# Altium PCB FLOLED.PcbDoc
Units mm, origin at the board's own origin, x right, y up, seen from the top; angles counter-clockwise.
Board outline 24.22 x 34.56 mm, 2 copper layers (Top Layer, Bottom Layer); 27 components, 13 nets, 64 pads, 10 vias.
Unrouted connection lines stored in the file: 3.
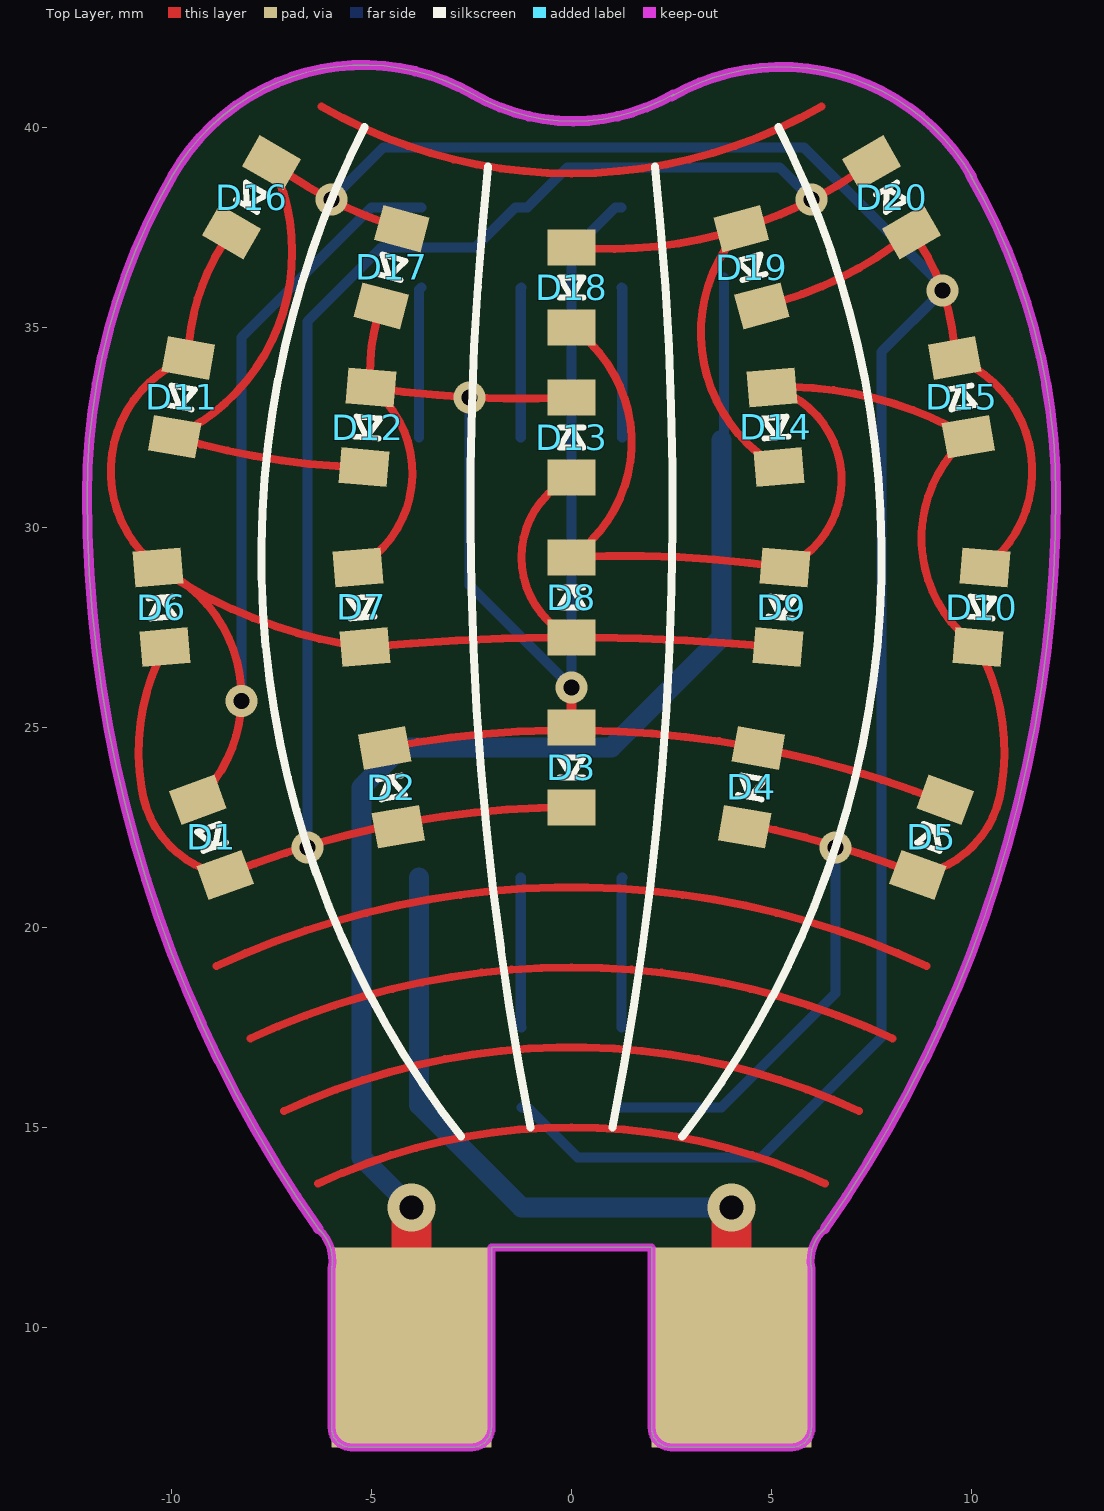
[diagram p0: Top Layer view]
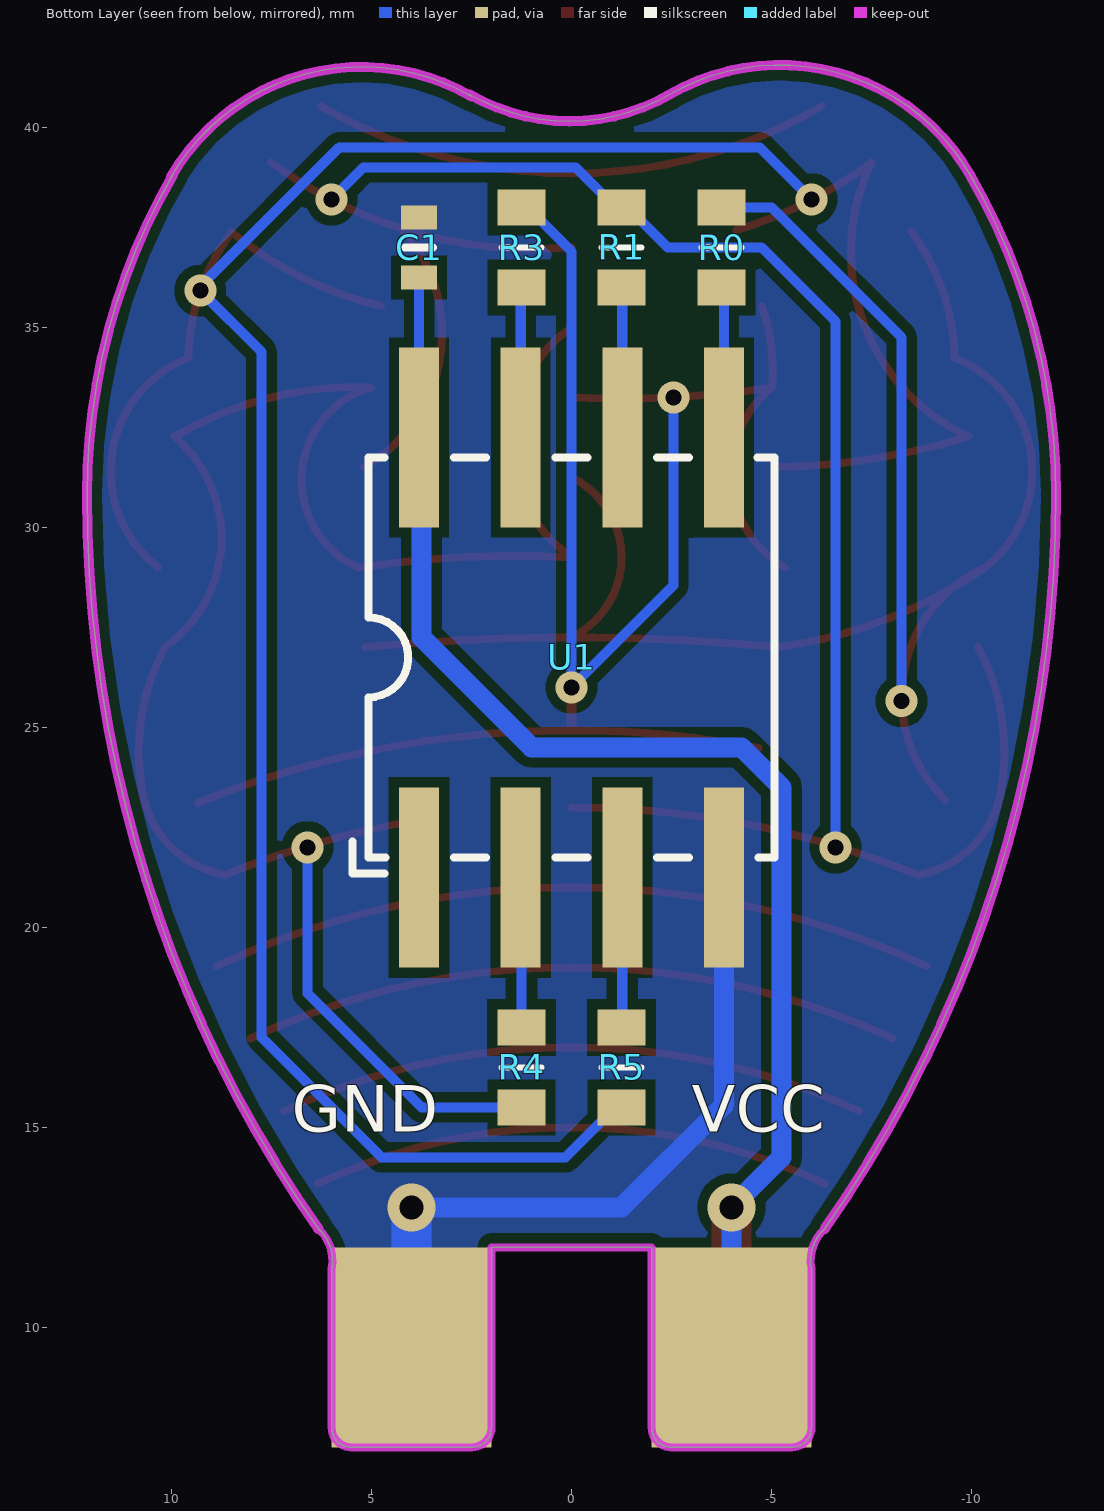
[diagram p1: Bottom Layer view, seen from below]
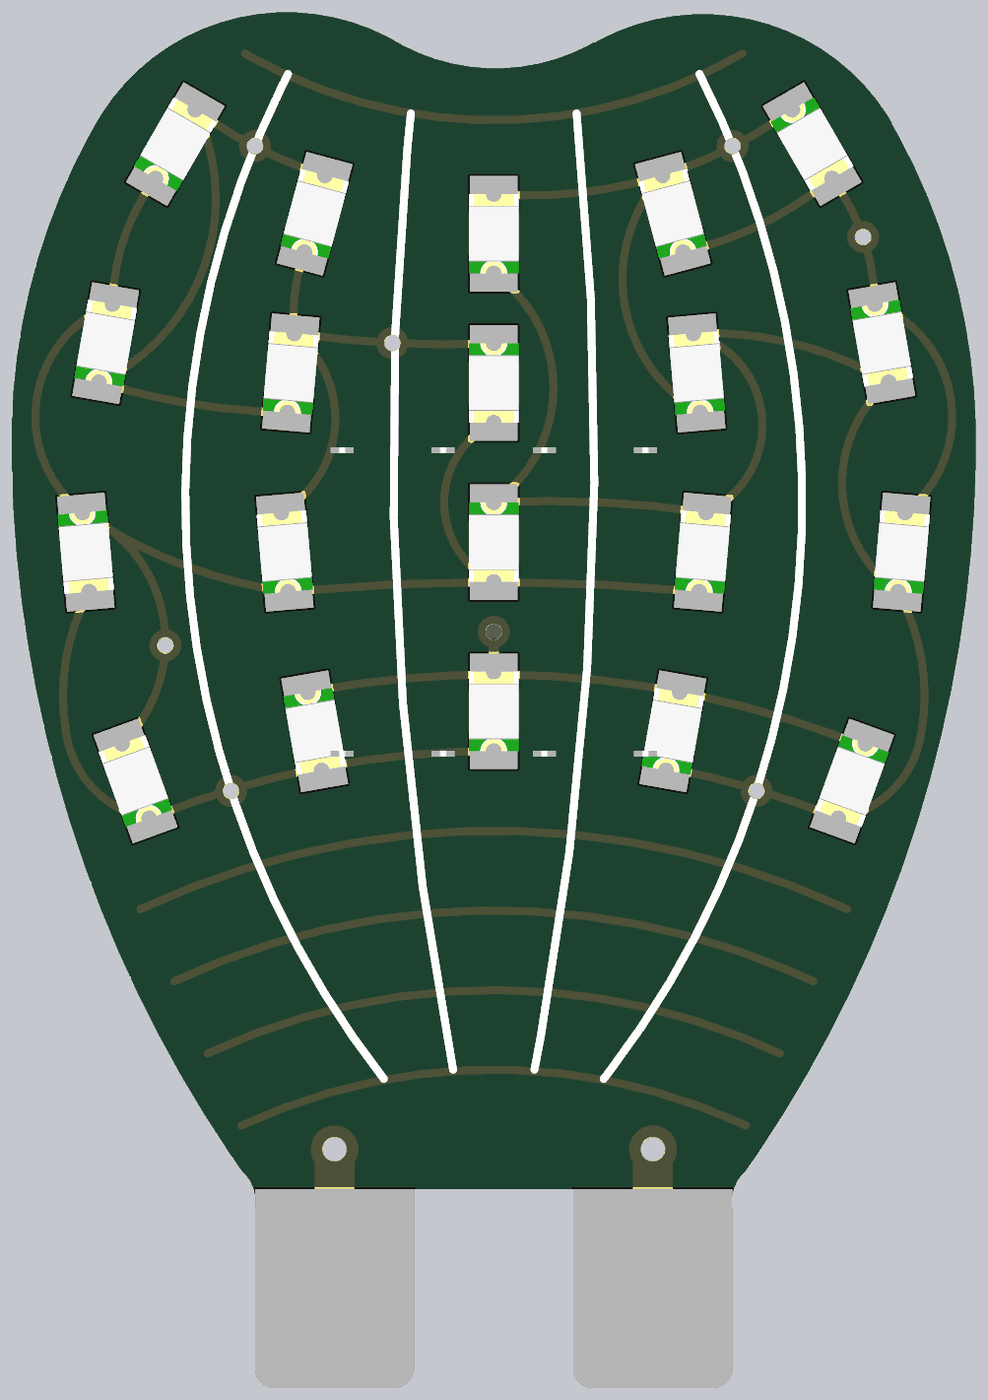
[diagram p2: 3D render of the assembled board from above, using the file's embedded part models]
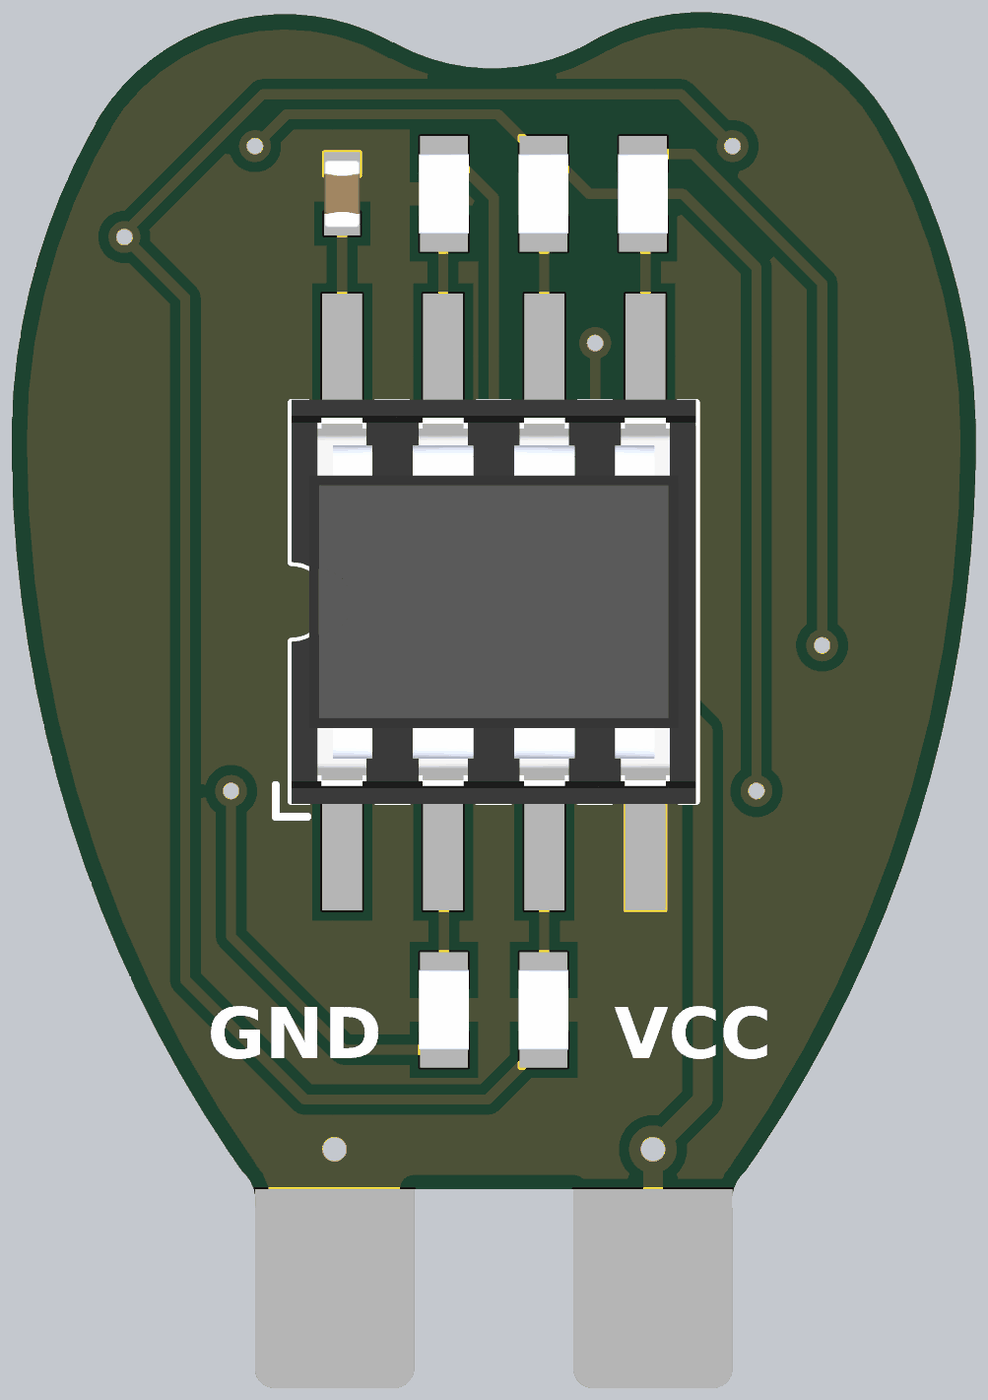
[diagram p3: 3D render of the assembled board from below, using the file's embedded part models]

## Layer stack, top to bottom
Top Solder: solder mask 0.0102, Solder Resist, Dk 3.5
Top Layer: signal copper 0.0356
Dielectric 1: dielectric 0.32, FR-4, Dk 4.8
Bottom Layer: signal copper 0.0356
Bottom Solder: solder mask 0.0102, Solder Resist, Dk 3.5

## Board outline
-6,7.5 -6,11.47 ccw(c-7.035,11.678) -6.333,12.467 cw(c19.889,30.809) -12.111,30.809 cw(c3.889,30.809) -9.968,38.809 cw(c-5.205,36.059) -2.455,40.822 ccw(c0.045,45.152) 2.545,40.822 2.5,40.774 cw(c5.25,36.011) 10.013,38.761 9.968,38.809 cw(c-3.889,30.809) 12.111,30.809 cw(c-19.889,30.809) 6.333,12.467 ccw(c7.035,11.678) 6,11.47 6,7.5 cw(c5.5,7.5) 5.5,7 2.5,7 cw(c2.5,7.5) 2,7.5 2,12 -2,12 -2,7.5 cw(c-2.5,7.5) -2.5,7 -5.5,7 cw(c-5.5,7.5)

## Design rules (kind name [scope] priority, off if disabled: settings)
Clearance [All] p1: gap=0.254 ignorepadtopadclearanceinfootprint=FALSE except(0: Arc-Hole Track-Hole SMDPad-Hole THPad-Hole Via-Hole Fill-Hole Poly-Hole Region-Hole Text-Hole)
PolygonConnect [All] p1: connectstyle=Direct reliefconductorwidth=0.254 reliefentries=4 polygonreliefangle="90 Angle" airgapwidth=0.254
RoutingVias [All] p1: holewidth=0.711 width=1.27 viastyle="Through Hole" minholewidth=0.711 minwidth=1.27 maxholewidth=0.711 maxwidth=1.27
SilkToSilkClearance [All] p1: silktosilkclearance=0.15
SilkToSolderMaskClearance [IsPad] p1: minsilkscreentomaskgap=0.15 clearancetoexposedcopper=TRUE
SolderMaskExpansion [All] p1: expansion=0.102 istentingtop=FALSE
Width [All] p1: maxlimit=1 minlimit=0.2 preferedwidth=0.254
28 further rules are at their usual default settings.

## Classes and differential pairs
component class FLOLED: C1 D1 D4 D6 D12 D14 D15 D16 R0 R1 R3 R4 R5 U1

## Components (designator, comment, footprint, x,y, rotation, side; value= is the part's Value field where it differs from the comment)
C1 "Capacitor" 0603C 3.81,37 r270 bottom value=1u
D1 "LED Red" 0805D -9,22.25 r290 top value=2.1V
D2 "LED Red" 0805D -4.5,23.5 r100 top value=2.1V (schematic designator D3)
D3 "LED Red" 0805D 0,24 r270 top value=2.1V (schematic designator D4)
D4 "LED Red" 0805D 4.5,23.5 r260 top value=2.1V (schematic designator D5)
D5 "LED Red" 0805D 9,22.25 r70 top value=2.1V (schematic designator D6)
D6 "LED Red" 0805D -10.25,28 r95 top value=2.1V (schematic designator D2)
D7 "LED Red" 0805D -5.25,28 r275 top value=2.1V (schematic designator D13)
D8 "LED Red" 0805D 0,28.25 r90 top value=2.1V (schematic designator D15)
D9 "LED Red" 0805D 5.25,28 r265 top value=2.1V (schematic designator D16)
D10 "LED Red" 0805D 10.25,28 r265 top value=2.1V (schematic designator D8)
D11 "LED Red" 0805D -9.75,33.25 r260 top value=2.1V (schematic designator D9)
D12 "LED Red" 0805D -5.1,32.5 r265 top value=2.1V
D13 "LED Red" 0805D 0,32.25 r90 top value=2.1V (schematic designator D14)
D14 "LED Red" 0805D 5.1,32.5 r275 top value=2.1V (schematic designator D17)
D15 "LED Red" 0805D 9.75,33.25 r100 top value=2.1V (schematic designator D7)
D16 "LED Red" 0805D -8,38.25 r240 top value=2.1V (schematic designator D10)
D17 "LED Red" 0805D -4.5,36.5 r255 top value=2.1V (schematic designator D11)
D18 "LED Red" 0805D 0,36 r270 top value=2.1V
D19 "LED Red" 0805D 4.5,36.5 r285 top value=2.1V
D20 "LED Red" 0805D 8,38.25 r120 top value=2.1V
R0 "Resistor" 0805R -3.75,37 r90 bottom value=100R
R1 "Resistor" 0805R -1.25,37 r90 bottom value=100R
R3 "Resistor" 0805R 1.25,37 r90 bottom value=100R
R4 "Resistor" 0805R 1.25,16.5 r270 bottom value=100R
R5 "Resistor" 0805R -1.25,16.5 r270 bottom value=100R
U1 "ATtiny13A-5" "DIP-8 - SMD" 0,26.75 r180 bottom value=13A

## Footprints (in the part's own frame and the unit in brackets; to place one, negate y for a bottom-side part, rotate by r counter-clockwise, add the part's x,y. Pads: shape width x height; smd on the part's side, far side on the other; paste and mask are expansions set on the pad)
0603C [mm] "0603/1608 SMD general footprint"
  rect 0.6x0.9 smd mask+0.05: 1(-0.75,0) 2(0.75,0)
  silkscreen extent 0,-0.35 0,0.35, body extent -0.85,-0.45 0.85,0.45, height 0.9
0805D [mm] "0603/1608 SMD LED general footprint"
  rect 0.9x1.2 smd mask+0.05: 1(-1,0) 2(1,0)
  silkscreen extent -0.25,-0.3 0.25,0.3, body extent -1,-0.63 1,0.63, height 0.7
0805R [mm] "0603/1608 SMD LED general footprint"
  rect 0.9x1.2 smd mask+0.05: 1(-1,0) 2(1,0)
  silkscreen extent 0,-0.5 0,0.5, body extent -1,-0.63 1,0.63, height 0.6
"DIP-8 - SMD" [mm] "through hole DIP-8 2.54mm"
  rect 1x4.5 smd mask+0.05: 1(-3.81,-5.5) 2(-1.27,-5.5) 3(1.27,-5.5) 4(3.81,-5.5) 5(3.81,5.5) 6(1.27,5.5) 7(-1.27,5.5) 8(-3.81,5.5)
  silkscreen extent -5.48,-5.4 5.08,5, body extent -5.08,-5.08 5.08,5.08, height 9.48

## Part data
C1: "Capacitor 1uF"
D1 D2 D3 D4 D5 D6 D7 D8 D9 D10 D11 D12 D13 D14 D15 D16 D17 D18 D19 D20: library part LED-R, "Red LED Vf=2.1V Ic=20mA"
R0 R1 R3 R4 R5: library part RES, "Resistor 100Ω"
U1: "tiny AVR 8-pin microcontroller"

## Free pads (board coordinates)
  rect 4x5 smd mask+0.05: 1(-4,9.5) 2(4,9.5)
  rect 4x5 smd far side mask+0.05: 1(-4,9.5) 2(4,9.5)

## Via types
v1: diameter 0.8, hole 0.4, Top Layer to Bottom Layer, tented both sides, 8 vias
v2: diameter 1.2, hole 0.6, Top Layer to Bottom Layer, tented both sides, 2 vias

## Nets (pads, with @x,y where several pads share a name; then routed paths per layer and width w, separated by ;. In a path a pad name is that pad's centre, name@x,y a point inside that pad or via, vN(x,y) a via of type N, cw(c..) or ccw(c..) an arc to the next point about the centre after c; other vN are vias at no path point)
ADC2: R5.1 U1.3 | length 3.8
  Bottom Layer w0.254: U1.3 -1.27,17.52 R5.1
ADC3: R4.1 U1.2 | length 3.8
  Bottom Layer w0.254: R4.1 1.25,21.23 U1.2
GND: C1.1 pad.2 U1.4 | length 21.6
  Top Layer w1: pad.2@4,9.5 v2(4,13)
  Bottom Layer w0.5: U1.4 -3.81,15.56 -1.25,13 v2(4,13)
  Bottom Layer w1: pad.2@4,9.5 v2(4,13)
MISO: R1.1 U1.6 | length 3.8
  Bottom Layer w0.254: U1.6 -1.27,35.98 R1.1
MOSI: R0.1 U1.5 | length 3.8
  Bottom Layer w0.254: U1.5 -3.81,35.94 R0.1
PB0: D1.1 D6.2 D7.2 D8.1 D9.2 D11.1 D13.1 D16.2 R0.2 | length 52.6
  Top Layer w0.2: D1.1 ccw(c-11.81,25.755) -9.531,28.49 ; D16.2 ccw(c-4.186,34.151) D11.1 ccw(c-8.483,31.401) D6.2 ; D8.1 cw(c0.975,29.25) D13.1 ; D9.2 ccw(c0,-27.008) D7.2 cw(c-3.546,38.918) -9.531,28.49 ; D6.2 ccw(c-3.546,38.918) -9.531,28.49 ; D6.2 cw(c-11.81,25.755) -9.531,28.49
  Bottom Layer w0.254: v1(-8.251,25.657) -8.251,34.749 -5,38 R0.2
PB1: D1.2 D2.1 D3.2 D6.1 D14.2 D18.1 D19.1 D20.2 R1.2 | length 58.3
  Top Layer w0.2: D6.1 ccw(c-5.349,24.396) -10.75,23.5 ccw(c-8.218,23.824) D1.2 cw(c0,0) D3.2 ; D18.1 ccw(c0.933,48.042) D19.1 ; D14.2 cw(c7.097,34.863) D19.1 ; D20.2 cw(c0.933,48.042) D19.1
  Bottom Layer w0.254: v1(-6.6,22) -6.6,35.15 -4.75,37 -2.4,37 -1.4,38 R1.2 -1.1,38 -0.1,39 5.2,39 v1(6,38.2)
PB2: D2.2 D3.1 D4.1 D5.2 D7.1 D12.1 D13.2 D17.2 R3.2 | length 48.6
  Top Layer w0.2: D7.1 ccw(c-6.704,31.356) D12.1 ; D17.2 ccw(c-0.25,33.937) D12.1 ; D2.2 cw(c0,0) D5.2@9.342,23.11 ; D13.2 cw(c-1.25,58.954) D12.1
  Top Layer w0.254: D3.1 v1(0,26)
  Bottom Layer w0.254: v1(-2.547,33.252) -2.547,28.547 v1(0,26) 0,36.9 1.1,38 R3.2
PB3: D4.2 D5.1 D8.2 D9.1 D10.2 D14.1 D15.1 D18.2 R4.2 | length 50.7
  Top Layer w0.2: D18.2 cw(c-2,32.125) D8.2 cw(c1.375,1.92) D9.1 ccw(c4.347,31.187) D14.1 cw(c5.385,24.57) D15.1 ccw(c12.081,29.727) D10.2 cw(c5.349,24.396) 10.75,23.5 cw(c8.218,23.824) D5.1 ccw(c0,0) v1@6.608,22.032 ; D4.2@4.34,22.589 cw(c0,0) v1@6.608,22.032 ; v1(6.6,22) cw(c14.522,20.13) v1@6.608,22.032
  Bottom Layer w0.254: R4.2 3.75,15.5 6.6,18.35 v1(6.6,22)
PB4: D10.1 D11.2 D12.2 D15.2 D16.1 D17.1 D19.2 D20.1 R5.2 | length 78.1
  Top Layer w0.2: D12.2 cw(c-4.793,49.069) D11.2 ccw(c-12.072,36.879) D16.1 ccw(c-0.933,48.042) D17.1@-4.121,37.429 ; D19.2 ccw(c2.675,44.455) D20.1 cw(c4.186,34.151) D15.2 cw(c8.483,31.401) D10.1
  Bottom Layer w0.254: v1(-6,38.2) -4.7,39.5 5.804,39.5 9.28,36.025 v1(9.28,35.916) 7.75,34.386 7.75,17.25 4.75,14.25 0.15,14.25 -1.1,15.5 R5.2
RST: U1.1
SCK: R3.1 U1.7 | length 3.8
  Bottom Layer w0.254: R3.1 1.27,35.98 U1.7
VCC: C1.2 pad.1 U1.8 | length 37.6
  Top Layer w1: pad.1@-4,9.5 v2(-4,13)
  Bottom Layer w0.254: U1.8@3.75,32.19 U1.8 C1.2
  Bottom Layer w0.5: pad.1@-4,9.5 v2(-4,13) -5.25,14.25 -5.25,23.5 -4.25,24.5 1,24.5 3.75,27.25 U1.8@3.75,32.19
copper on no net: | length 75.9
  Top Layer w0.2: -8.875,19.032 cw(c0,0) 8.875,19.032 ; -8.03,17.22 cw(c0,0) 8.03,17.22 ; -7.185,15.407 cw(c0,0) 7.185,15.407 ; -6.339,13.595 cw(c0,0) 6.339,13.595 ; -6.25,40.524 ccw(c0,51.349) 6.25,40.524

## Polygon pours and split planes (outlines as drawn)
MOSI on Top Layer "BOTTOMGND" (solid, remove dead copper, pour order 1): -6,7.5 -6,11.47 ccw(c-7.035,11.678) -6.333,12.467 cw(c19.889,30.809) -12.111,30.809 cw(c3.889,30.809) -9.968,38.809 cw(c-5.205,36.059) -2.455,40.822 ccw(c0.045,45.152) 2.545,40.822 2.5,40.774 cw(c5.25,36.011) 10.013,38.761 9.968,38.809 cw(c-3.889,30.809) 12.111,30.809 cw(c-19.889,30.809) 6.333,12.467 ccw(c7.035,11.678) 6,11.47 6,7.5 cw(c5.5,7.5) 5.5,7 2.5,7 cw(c2.5,7.5) 2,7.5 2,12 -2,12 -2,7.5 cw(c-2.5,7.5) -2.5,7 -5.5,7 cw(c-5.5,7.5)
GND on Bottom Layer "BOTTOMGND" (solid, remove dead copper, pour order 0): -6,7.5 -6,11.47 ccw(c-7.035,11.678) -6.333,12.467 cw(c19.889,30.809) -12.111,30.809 cw(c3.889,30.809) -9.968,38.809 cw(c-5.205,36.059) -2.455,40.822 ccw(c0.045,45.152) 2.545,40.822 2.5,40.774 cw(c5.25,36.011) 10.013,38.761 9.968,38.809 cw(c-3.889,30.809) 12.111,30.809 cw(c-19.889,30.809) 6.333,12.467 ccw(c7.035,11.678) 6,11.47 6,7.5 cw(c5.5,7.5) 5.5,7 2.5,7 cw(c2.5,7.5) 2,7.5 2,12 -2,12 -2,7.5 cw(c-2.5,7.5) -2.5,7 -5.5,7 cw(c-5.5,7.5)

## Keep-outs
Keep-Out Layer:
  lines w0.2: -6.333,12.467 cw(c-7.035,11.678) -6,11.47 -6,7.5 ccw(c-5.5,7.5) -5.5,7 -2.5,7 ccw(c-2.5,7.5) -2,7.5 -2,12 2,12 2,7.5 ccw(c2.5,7.5) 2.5,7 5.5,7 ccw(c5.5,7.5) 6,7.5 6,11.47 cw(c7.035,11.678) 6.333,12.467
  lines w0.254: -6.333,12.467 cw(c19.889,30.809) -12.111,30.809 cw(c3.889,30.809) -9.968,38.809 cw(c-5.205,36.059) -2.455,40.822 ccw(c0.045,45.152) 2.545,40.822 ; 2.5,40.774 cw(c5.25,36.011) 10.013,38.761 ; 6.333,12.467 ccw(c-19.889,30.809) 12.111,30.809 ccw(c-3.889,30.809) 9.968,38.809

## Silkscreen, mask and mechanical layers (free items; w line width, h text height)
Top Overlay:
  lines w0.2: -5.171,40.009 ccw(c15.845,29.28) -2.763,14.77 ; -2.083,39.018 ccw(c78.157,30.529) -1.022,15.001 ; 1.022,15.001 ccw(c-78.157,30.529) 2.083,39.018 ; 2.763,14.77 ccw(c-15.845,29.28) 5.171,40.009
Bottom Overlay:
  text "VCC" at -3,14.5 h2
  text "GND" at 7,14.5 h2